# EAGLE board CT_schematic (EAGLE 7.6.0)

Size 100 x 80 mm. Coordinates in mm from the lower left corner, seen from the top.
Outline: 0,0 100,0 100,80 0,80 0,0
Copper layers (1*16): Top 0.035mm / dielectric 1.5mm / Bottom 0.035mm
Design rules "default": minimum track width 10mil, minimum drill 24mil, track to track 8mil, track to pad 8mil, pad to pad 8mil, via to via 8mil, smd to smd 8mil, copper to edge 40mil, drill to drill 8mil, minimum pad ring 10mil, minimum via ring 8mil, stop-mask expansion 4mil, vias tented up to drill 0mil, thermal gap 10mil

## Footprints (pad centres in the part's own frame; a part is rotated, then mirrored left to right if it is on the bottom)
C0603 = smd 0.8 x 0.8: 1 -0.762,0; 2 0.762,0
C0402 = smd 0.5 x 0.5: 1 -0.508,0; 2 0.508,0
C1206 = smd 1.3 x 1.6: 1 -1.524,0; 2 1.524,0
C0805 = smd 1.2 x 1.3: 1 -1.016,0; 2 1.016,0
2220 = smd 1.85 x 5.5: 1 -2.55,0; 2 2.55,0
C1210 = smd 1.2 x 2.5: 1 -1.524,0; 2 1.524,0
EXV-9H = smd 3.505 x 1.676: 1 -2.857,0; 2 2.857,0
L0603 = smd 0.8 x 0.8: 1 -0.762,0; 2 0.762,0
DR1040 = smd 1.6 x 3.2: 1 -4.458,0; 2 4.458,0
PJ-037B_PACKAGE = drill 3.7 square: 1 12,0 | drill 3.2 square: 2 6,0
R0603 = smd 0.8 x 0.8: 1 -0.762,0; 2 0.762,0
TFBGA216 = smd 0.4 x 0.4: A1 -5.6,5.6; A2 -4.8,5.6; A3 -4,5.6; A4 -3.2,5.6; A5 -2.4,5.6; A6 -1.6,5.6; A7 -0.8,5.6; A8 0,5.6; A9 0.8,5.6; A10 1.6,5.6; A11 2.4,5.6; A12 3.2,5.6; A13 4,5.6; A14 4.8,5.6; A15 5.6,5.6; B1 -5.6,4.8; B2 -4.8,4.8; B3 -4,4.8; B4 -3.2,4.8; B5 -2.4,4.8; B6 -1.6,4.8; B7 -0.8,4.8; B8 0,4.8; B9 0.8,4.8; B10 1.6,4.8; B11 2.4,4.8; B12 3.2,4.8; B13 4,4.8; B14 4.8,4.8; B15 5.6,4.8; C1 -5.6,4; C2 -4.8,4; C3 -4,4; C4 -3.2,4; C5 -2.4,4; C6 -1.6,4; C7 -0.8,4; C8 0,4; C9 0.8,4; C10 1.6,4; C11 2.4,4; C12 3.2,4; C13 4,4; C14 4.8,4; C15 5.6,4; D1 -5.6,3.2; D2 -4.8,3.2; D3 -4,3.2; D4 -3.2,3.2; D5 -2.4,3.2; D6 -1.6,3.2; D7 -0.8,3.2; D8 0,3.2; D9 0.8,3.2; D10 1.6,3.2; D11 2.4,3.2; D12 3.2,3.2; D13 4,3.2; D14 4.8,3.2; D15 5.6,3.2; E1 -5.6,2.4; E2 -4.8,2.4; E3 -4,2.4; E4 -3.2,2.4; E5 -2.4,2.4; E6 -1.6,2.4; E7 -0.8,2.4; E8 0,2.4; E9 0.8,2.4; E10 1.6,2.4; E11 2.4,2.4; E12 3.2,2.4; E13 4,2.4; E14 4.8,2.4; E15 5.6,2.4; F1 -5.6,1.6; F2 -4.8,1.6; F3 -4,1.6; F4 -3.2,1.6; F5 -2.4,1.6; F6 -1.6,1.6; F7 -0.8,1.6; F8 0,1.6; F9 0.8,1.6; F10 1.6,1.6; F11 2.4,1.6; F12 3.2,1.6; F13 4,1.6; F14 4.8,1.6; F15 5.6,1.6; G1 -5.6,0.8; G2 -4.8,0.8; G3 -4,0.8; G4 -3.2,0.8; G5 -2.4,0.8; G6 -1.6,0.8; G10 1.6,0.8; G11 2.4,0.8; G12 3.2,0.8; G13 4,0.8; G14 4.8,0.8; G15 5.6,0.8; H1 -5.6,0; H2 -4.8,0; H3 -4,0; H4 -3.2,0; H5 -2.4,0; H6 -1.6,0; H10 1.6,0; H11 2.4,0; H12 3.2,0; H13 4,0; H14 4.8,0; H15 5.6,0; J1 -5.6,-0.8; J2 -4.8,-0.8; J3 -4,-0.8; J4 -3.2,-0.8; J5 -2.4,-0.8; J6 -1.6,-0.8; J10 1.6,-0.8; J11 2.4,-0.8; J12 3.2,-0.8; J13 4,-0.8; J14 4.8,-0.8; J15 5.6,-0.8; K1 -5.6,-1.6; K2 -4.8,-1.6; K3 -4,-1.6; K4 -3.2,-1.6; K5 -2.4,-1.6; K6 -1.6,-1.6; K7 -0.8,-1.6; K8 0,-1.6; K9 0.8,-1.6; K10 1.6,-1.6; K11 2.4,-1.6; K12 3.2,-1.6; K13 4,-1.6; K14 4.8,-1.6; K15 5.6,-1.6; L1 -5.6,-2.4; L2 -4.8,-2.4; L3 -4,-2.4; L4 -3.2,-2.4; L5 -2.4,-2.4; L6 -1.6,-2.4; L7 -0.8,-2.4; L8 0,-2.4; L9 0.8,-2.4; L10 1.6,-2.4; L11 2.4,-2.4; L12 3.2,-2.4; L13 4,-2.4; L14 4.8,-2.4; L15 5.6,-2.4; M1 -5.6,-3.2; M2 -4.8,-3.2; M3 -4,-3.2; M4 -3.2,-3.2; M5 -2.4,-3.2; M6 -1.6,-3.2; M7 -0.8,-3.2; M8 0,-3.2; M9 0.8,-3.2; M10 1.6,-3.2; M11 2.4,-3.2; M12 3.2,-3.2; M13 4,-3.2; M14 4.8,-3.2; M15 5.6,-3.2; N1 -5.6,-4; N2 -4.8,-4; N3 -4,-4; N4 -3.2,-4; N5 -2.4,-4; N6 -1.6,-4; N7 -0.8,-4; N8 0,-4; N9 0.8,-4; N10 1.6,-4; N11 2.4,-4; N12 3.2,-4; N13 4,-4; N14 4.8,-4; N15 5.6,-4; P1 -5.6,-4.8; P2 -4.8,-4.8; P3 -4,-4.8; P4 -3.2,-4.8; P5 -2.4,-4.8; P6 -1.6,-4.8; P7 -0.8,-4.8; P8 0,-4.8; P9 0.8,-4.8; P10 1.6,-4.8; P11 2.4,-4.8; P12 3.2,-4.8; P13 4,-4.8; P14 4.8,-4.8; P15 5.6,-4.8; R1 -5.6,-5.6; R2 -4.8,-5.6; R3 -4,-5.6; R4 -3.2,-5.6; R5 -2.4,-5.6; R6 -1.6,-5.6; R7 -0.8,-5.6; R8 0,-5.6; R9 0.8,-5.6; R10 1.6,-5.6; R11 2.4,-5.6; R12 3.2,-5.6; R13 4,-5.6; R14 4.8,-5.6; R15 5.6,-5.6
ETRX3587 = smd 1 x 1.4: 1 0,0; 2 1.27,0; 3 2.54,0; 4 3.81,0; 5 5.08,0; 6 6.35,0; 7 7.62,0; 8 8.89,0; 9 10.16,0; 10 11.43,0; 11 12.7,0; 12 13.97,0; 13 15.24,0; 14 16.51,0; 15 17.78,0; 16 19.05,0; 17 20.32,0; 18 21.59,0; 19 22.86,0; 20 22.86,18.8; 21 21.59,18.8; 22 20.32,18.8; 23 19.05,18.8; 24 17.78,18.8; 25 16.51,18.8; 26 15.24,18.8; 27 13.97,18.8; 28 12.7,18.8; 29 11.43,18.8; 30 10.16,18.8; 31 8.89,18.8; 32 7.62,18.8; 33 6.35,18.8
WSON-6 = smd 0.4 x 0.6: 1 -1,-1.4; 2 0,-1.4; 3 1,-1.4; 4 1,1.4; 5 0,1.4; 6 -1,1.4 | drill 0.2 pad 0.3: P$1 0.95,0; P$2 -0.95,0; P$3 0,-0.5; P$4 0,0.5 | smd 2.4 x 1.5: PAD 0,0
SOIC-8 = smd 1.6 x 0.6: 1 -2.7,1.905 | smd 1.55 x 0.6: 2 -2.7,0.635; 3 -2.7,-0.635; 4 -2.7,-1.905; 5 2.7,-1.905; 6 2.7,-0.635; 7 2.7,0.635; 8 2.7,1.905
182-009-MALE = drill 1.194 pad 1.524 octagon: 1 -5.537,10.923; 2 -2.769,10.923; 3 0,10.923; 4 2.769,10.923; 5 5.537,10.923; 6 -4.153,8.08; 7 -1.384,8.08; 8 1.384,8.08; 9 4.153,8.08 | hole 3.048: -12.446,9.501; 12.446,9.501
LBGA-64 = smd 0.559 x 0.559: A1 -3.5,3.5; A2 -2.5,3.5; A3 -1.5,3.5; A4 -0.5,3.5; A5 0.5,3.5; A6 1.5,3.5; A7 2.5,3.5; A8 3.5,3.5; B1 -3.5,2.5; B2 -2.5,2.5; B3 -1.5,2.5; B4 -0.5,2.5; B5 0.5,2.5; B6 1.5,2.5; B7 2.5,2.5; B8 3.5,2.5; C1 -3.5,1.5; C2 -2.5,1.5; C3 -1.5,1.5; C4 -0.5,1.5; C5 0.5,1.5; C6 1.5,1.5; C7 2.5,1.5; C8 3.5,1.5; D1 -3.5,0.5; D2 -2.5,0.5; D3 -1.5,0.5; D4 -0.5,0.5; D5 0.5,0.5; D6 1.5,0.5; D7 2.5,0.5; D8 3.5,0.5; E1 -3.5,-0.5; E2 -2.5,-0.5; E3 -1.5,-0.5; E4 -0.5,-0.5; E5 0.5,-0.5; E6 1.5,-0.5; E7 2.5,-0.5; E8 3.5,-0.5; F1 -3.5,-1.5; F2 -2.5,-1.5; F3 -1.5,-1.5; F4 -0.5,-1.5; F5 0.5,-1.5; F6 1.5,-1.5; F7 2.5,-1.5; F8 3.5,-1.5; G1 -3.5,-2.5; G2 -2.5,-2.5; G3 -1.5,-2.5; G4 -0.5,-2.5; G5 0.5,-2.5; G6 1.5,-2.5; G7 2.5,-2.5; G8 3.5,-2.5; H1 -3.5,-3.5; H2 -2.5,-3.5; H3 -1.5,-3.5; H4 -0.5,-3.5; H5 0.5,-3.5; H6 1.5,-3.5; H7 2.5,-3.5; H8 3.5,-3.5
QFN-32 = smd 0.6 x 0.3: 1 -2.3,1.75; 2 -2.3,1.25; 3 -2.3,0.75; 4 -2.3,0.25; 5 -2.3,-0.25; 6 -2.3,-0.75; 7 -2.3,-1.25; 8 -2.3,-1.75; 17 2.3,-1.75; 18 2.3,-1.25; 19 2.3,-0.75; 20 2.3,-0.25; 21 2.3,0.25; 22 2.3,0.75; 23 2.3,1.25; 24 2.3,1.75 | smd 0.3 x 0.6: 9 -1.75,-2.3; 10 -1.25,-2.3; 11 -0.75,-2.3; 12 -0.25,-2.3; 13 0.25,-2.3; 14 0.75,-2.3; 15 1.25,-2.3; 16 1.75,-2.3; 25 1.75,2.3; 26 1.25,2.3; 27 0.75,2.3; 28 0.25,2.3; 29 -0.25,2.3; 30 -0.75,2.3; 31 -1.25,2.3; 32 -1.75,2.3 | smd 3.2 x 3.2: EXP 0,0
SJ-43515TS-SMT-TR = smd 2.2 x 3: 1 0.6,-7.4; 4 3.4,-7.4 | smd 3 x 3: 2 12.8,-7.4; 5 17,-3 | smd 2 x 3: 3 5.3,0; 6 2.5,0 | drill 1.8: P$7 4.5,-3.69; P$8 11.54,-3.69
WM-64PC = drill 0.6 pad 1: 1 -1,0.95; 2 -1,-0.95
ABLS-25.000MHZ-B2F-T = smd 5.6 x 2.8: 1 -3.81,0; 2 5.69,0
ASEK = smd 1.4 x 1: 1 -1.1,-0.8; 2 1.1,-0.8; 3 1.1,0.8; 4 -1.1,0.8
ASFL1 = smd 1.7 x 1.5: 1 -1.27,-1.1; 2 1.27,-1.1; 3 1.27,1.1; 4 -1.27,1.1
WSON-8 = smd 0.3 x 0.6: 1 -0.75,0; 2 0.05,0; 3 0.85,0; 4 1.65,0; 5 1.65,3.8; 6 0.85,3.8; 7 0.05,3.8; 8 -0.75,3.8 | smd 3 x 2.6: PAD 0.45,1.9
QFN-16_EP = smd 0.805 x 0.3: 1 -1.452,0.75; 2 -1.452,0.25; 3 -1.452,-0.25; 4 -1.452,-0.75; 9 1.452,-0.75; 10 1.452,-0.25; 11 1.452,0.25; 12 1.452,0.75 | smd 0.3 x 0.805: 5 -0.75,-1.452; 6 -0.25,-1.452; 7 0.25,-1.452; 8 0.75,-1.452; 13 0.75,1.452; 14 0.25,1.452; 15 -0.25,1.452; 16 -0.75,1.452 | smd 1.55 x 1.55: 17 0,0
SON-6 = smd 0.55 x 0.3: 1 -0.355,0.5 | smd 0.52 x 0.3: 2 -0.37,0; 3 -0.37,-0.5; 4 0.37,-0.5; 5 0.37,0; 6 0.37,0.5
SW_4-1437565-2 = smd 1.4 x 2.1: 1 -2.23,4.55; 2 -2.23,-4.55; 3 2.23,4.55; 4 2.23,-4.55
LGM67K-G1J2-24-Z = smd 0.8 x 1.4: A -2,0; C 0,0
NC7SZ125M5X = smd 1.3 x 0.7: 1 -1.3,0.95; 2 -1.3,0; 3 -1.3,-0.95; 4 1.3,-0.95; 5 1.3,0.95

## Placement (x,y rotation side)
C1  1e-06  [C0603]  -35.56,91.44 0 top  (outside the outline)
C2  1e-07  [C0603]  -39.37,91.44 0 top  (outside the outline)
C3  1e-07  [C0603]  -43.18,91.44 0 top  (outside the outline)
C4  1e-07  [C0603]  -46.99,91.44 0 top  (outside the outline)
C5  1e-07  [C0603]  -50.8,91.44 0 top  (outside the outline)
C6  1e-07  [C0603]  -54.61,91.44 0 top  (outside the outline)
C7  1e-07  [C0603]  -58.42,91.44 0 top  (outside the outline)
C8  1e-07  [C0603]  -62.23,91.44 0 top  (outside the outline)
C9  1e-07  [C0603]  -66.04,91.44 0 top  (outside the outline)
C10  1e-07  [C0603]  -69.85,91.44 0 top  (outside the outline)
C11  1e-07  [C0603]  -73.66,91.44 0 top  (outside the outline)
C12  1e-07  [C0603]  -77.47,91.44 0 top  (outside the outline)
C13  1e-07  [C0603]  -81.28,91.44 0 top  (outside the outline)
C14  1e-07  [C0603]  -85.09,91.44 0 top  (outside the outline)
C15  1e-07  [C0603]  -88.9,91.44 0 top  (outside the outline)
C16  1e-07  [C0603]  -92.71,91.44 0 top  (outside the outline)
C17  1e-07  [C0603]  -96.52,91.44 0 top  (outside the outline)
C18  1e-07  [C0603]  -15.24,96.52 0 top  (outside the outline)
C19  1e-07  [C0603]  -19.05,96.52 0 top  (outside the outline)
C20  1e-07  [C0603]  -22.86,96.52 0 top  (outside the outline)
C21  1e-07  [C0603]  -26.67,96.52 0 top  (outside the outline)
C22  4.7e-06  [C0603]  -24.13,91.44 0 top  (outside the outline)
C23  1e-08  [C0603]  -30.48,96.52 0 top  (outside the outline)
C24  1e-06  [C0603]  -34.29,96.52 0 top  (outside the outline)
C25  2.2e-06  [C0603]  -27.94,91.44 0 top  (outside the outline)
C26  2.2e-06  [C0603]  -31.75,91.44 0 top  (outside the outline)
C27  1e-11  [C0402]  -57.15,101.6 0 top  (outside the outline)
C28  1e-11  [C0402]  -60.96,101.6 0 top  (outside the outline)
C29  1e-07  [C0402]  -64.77,101.6 0 top  (outside the outline)
C30  1e-08  [C0402]  -68.58,101.6 0 top  (outside the outline)
C31  1e-06  [C0603]  -38.1,96.52 0 top  (outside the outline)
C32  1e-06  [C0603]  -41.91,96.52 0 top  (outside the outline)
C33  1e-08  [C0402]  -72.39,101.6 0 top  (outside the outline)
C34  1e-08  [C0402]  -76.2,101.6 0 top  (outside the outline)
C35  1e-06  [C0603]  -45.72,96.52 0 top  (outside the outline)
C36  1e-06  [C0603]  -49.53,96.52 0 top  (outside the outline)
C37  1e-06  [C0603]  -53.34,96.52 0 top  (outside the outline)
C38  1e-06  [C0603]  -57.15,96.52 0 top  (outside the outline)
C39  1e-06  [C0603]  -60.96,96.52 0 top  (outside the outline)
C40  1e-06  [C0603]  -64.77,96.52 0 top  (outside the outline)
C41  1e-06  [C0603]  -68.58,96.52 0 top  (outside the outline)
C42  1e-07  [C0402]  -80.01,101.6 0 top  (outside the outline)
C43  1e-07  [C0402]  -83.82,101.6 0 top  (outside the outline)
C44  1e-07  [C0402]  -87.63,101.6 0 top  (outside the outline)
C45  1e-07  [C0402]  -91.44,101.6 0 top  (outside the outline)
C46  1e-06  [C0603]  -72.39,96.52 0 top  (outside the outline)
C47  1e-08  [C0402]  -95.25,101.6 0 top  (outside the outline)
C48  1e-08  [C0402]  -99.06,101.6 0 top  (outside the outline)
C49  1e-08  [C0402]  -15.24,106.68 0 top  (outside the outline)
C50  1e-05  [C1206]  -55.88,78.74 0 top  (outside the outline)
C51  1e-05  [C0805]  -80.01,78.74 0 top  (outside the outline)
C52  1e-05  [C0805]  -85.09,78.74 0 top  (outside the outline)
C53  1e-06  [C0603]  -76.2,96.52 0 top  (outside the outline)
C54  1e-07  [C0402]  -19.05,106.68 0 top  (outside the outline)
C55  6.8e-05  [2220]  -45.72,59.69 0 top  (outside the outline)
C56  1e-06  [C0603]  -80.01,96.52 0 top  (outside the outline)
C57  1e-05  [C1210]  -49.53,78.74 0 top  (outside the outline)
C58  1e-07  [C0402]  -22.86,106.68 0 top  (outside the outline)
C59  0.0001  [EXV-9H]  -63.5,69.85 0 top  (outside the outline)
C60  0.0001  [EXV-9H]  -74.93,69.85 0 top  (outside the outline)
C61  1e-08  [C0402]  -26.67,106.68 0 top  (outside the outline)
C62  1e-08  [C0402]  -30.48,106.68 0 top  (outside the outline)
C63  1e-08  [C0402]  -34.29,106.68 0 top  (outside the outline)
F1  240.0  [L0603]  -83.82,96.52 0 top  (outside the outline)
I1  3.8e-06  [DR1040]  -82.55,45.72 0 top  (outside the outline)
J1  PJ-037B  [PJ-037B_PACKAGE]  -55.88,48.26 0 top  (outside the outline)
R2  1000.0  [R0603]  -87.63,96.52 0 top  (outside the outline)
R7  4700.0  [R0603]  -91.44,96.52 0 top  (outside the outline)
R8  4700.0  [R0603]  -95.25,96.52 0 top  (outside the outline)
R9  4700.0  [R0603]  -15.24,101.6 0 top  (outside the outline)
R10  2200.0  [R0603]  -19.05,101.6 0 top  (outside the outline)
R12  2200.0  [R0603]  -22.86,101.6 0 top  (outside the outline)
R14  10000.0  [R0603]  -40.64,86.36 0 top  (outside the outline)
R15  10000.0  [R0603]  -45.72,86.36 0 top  (outside the outline)
R16  10000.0  [R0603]  -50.8,86.36 0 top  (outside the outline)
R17  10000.0  [R0603]  -55.88,86.36 0 top  (outside the outline)
R18  10000.0  [R0603]  -60.96,86.36 0 top  (outside the outline)
R19  120.0  [R0603]  -26.67,101.6 0 top  (outside the outline)
R20  10000.0  [R0603]  -66.04,86.36 0 top  (outside the outline)
R21  10000.0  [R0603]  -71.12,86.36 0 top  (outside the outline)
R22  10000.0  [R0603]  -76.2,86.36 0 top  (outside the outline)
R23  10000.0  [R0603]  -81.28,86.36 0 top  (outside the outline)
R24  10000.0  [R0603]  -86.36,86.36 0 top  (outside the outline)
R25  1270.0  [R0603]  -30.48,101.6 0 top  (outside the outline)
R26  1270.0  [R0603]  -34.29,101.6 0 top  (outside the outline)
R27  100000.0  [R0603]  -90.17,77.47 0 top  (outside the outline)
R28  200.0  [R0603]  -38.1,101.6 0 top  (outside the outline)
R29  1000.0  [R0603]  -41.91,101.6 0 top  (outside the outline)
R30  20000.0  [R0603]  -91.44,86.36 0 top  (outside the outline)
R31  91000.0  [R0603]  -96.52,86.36 0 top  (outside the outline)
R32  300000.0  [R0603]  -95.25,77.47 0 top  (outside the outline)
R33  100000.0  [R0603]  -15.24,86.36 0 top  (outside the outline)
R34  300000.0  [R0603]  -20.32,86.36 0 top  (outside the outline)
R35  100000.0  [R0603]  -25.4,86.36 0 top  (outside the outline)
R36  10000.0  [R0603]  -15.24,91.44 0 top  (outside the outline)
R37  10000.0  [R0603]  -20.32,91.44 0 top  (outside the outline)
R38  9100.0  [R0603]  -45.72,101.6 0 top  (outside the outline)
R39  680000.0  [R0603]  -30.48,86.36 0 top  (outside the outline)
R40  120000.0  [R0603]  -35.56,86.36 0 top  (outside the outline)
U1  STM32F429NEH6  [TFBGA216]  -24.13,31.75 0 top  (outside the outline)
U2  ETRX3587  [ETRX3587]  -48.26,1.27 0 top  (outside the outline)
U3  HDC1080DMBR  [WSON-6]  -34.29,69.85 0 top  (outside the outline)
U4  MCP2562-E/SN  [SOIC-8]  -36.83,59.69 0 top  (outside the outline)
U5  182-009-113R531  [182-009-MALE]  -73.66,6.35 0 top  (outside the outline)
U6  mt28ew512aba1HPC-0AAT  [LBGA-64]  -36.83,30.48 0 top  (outside the outline)
U7  SGTL5000XNAA3  [QFN-32]  -22.86,60.96 0 top  (outside the outline)
U8  SJ-43515TS-SMT-TR  [SJ-43515TS-SMT-TR]  -71.12,31.75 0 top  (outside the outline)
U9  SJ-43515TS-SMT-TR  [SJ-43515TS-SMT-TR]  -99.06,31.75 0 top  (outside the outline)
U10  SJ-43515TS-SMT-TR  [SJ-43515TS-SMT-TR]  -39.37,49.53 0 top  (outside the outline)
U11  WM-64PCT  [WM-64PC]  -95.25,45.72 0 top  (outside the outline)
U12  ABLS-25.000MHZ-B2F-T  [ABLS-25.000MHZ-B2F-T]  -26.67,80.01 0 top  (outside the outline)
U13  ASEK-32.768KHz-ECST  [ASEK]  -54.61,69.85 0 top  (outside the outline)
U14  ASFL-24.57MHZ-NCS  [ASFL1]  -27.94,71.12 0 top  (outside the outline)
U15  LP3878SDX-ADJ/NOPB  [WSON-8]  -67.31,58.42 0 top  (outside the outline)
U16  LTC3601EUD#PBF  [QFN-16_EP]  -50.8,101.6 0 top  (outside the outline)
U17  LP2951ACSDX/NOPB  [WSON-8]  -85.09,58.42 0 top  (outside the outline)
U18  TPS3895ADRYR  [SON-6]  -36.83,105.41 0 top  (outside the outline)
U19  4-1437565-2  [SW_4-1437565-2]  -72.39,46.99 0 top  (outside the outline)
U20  Q65110A2395  [LGM67K-G1J2-24-Z]  -38.1,78.74 0 top  (outside the outline)
U21  nc7sz125m5x  [NC7SZ125M5X]  -60.96,77.47 0 top  (outside the outline)
U22  nc7sz125m5x  [NC7SZ125M5X]  -67.31,77.47 0 top  (outside the outline)
U23  nc7sz125m5x  [NC7SZ125M5X]  -73.66,77.47 0 top  (outside the outline)

## Library data of the parts
C1-C63 F1 I1 J1 R2 R7-R10 R12 R14-R40 U1-U23 = circuit_tree

## Nets
CLK_CRYSTAL_U1_G1: C27.1 U1.G1 U12.1
CLK_CRYSTAL_U1_H1: C28.1 U1.H1 U12.2
CLK_U1_E1: U1.E1 U13.3
CLK_U7_21: U7.21 U14.3
GND: C1.2 C2.2 C3.2 C4.2 C5.2 C6.2 C7.2 C8.2 C9.2 C10.2 C11.2 C12.2 C13.2 C14.2 C15.2 C16.2 C17.2 C18.2 C19.2 C20.2 C21.2 C22.2 C23.2 C24.2 C25.2 C26.2 C27.2 C28.2 C29.2 C30.2 C31.2 C32.2 C33.2 C34.2 C42.2 C43.2 C44.2 C45.2 C46.2 C47.2 C48.2 C49.2 C50.2 C51.2 C52.2 C53.2 C55.1 C55.2 C56.2 C57.2 C58.2 C59.2 C60.2 C61.2 C62.2 C63.2 J1.2 R2.2 R16.2 R17.2 R18.2 R26.2 R29.2 R30.2 R32.2 R35.2 R38.2 R40.2 U1.F2 U1.F6 U1.F7 U1.F8 U1.F9 U1.F10 U1.G6 U1.G10 U1.H6 U1.H10 U1.J6 U1.J10 U1.K6 U1.K7 U1.K8 U1.K9 U1.K10 U1.L6 U1.M1 U1.N1 U2.1 U2.13 U2.19 U2.20 U2.31 U2.33 U3.2 U3.PAD U4.2 U4.8 U5.5 U6.E8 U6.H2 U6.H7 U7.1 U7.3 U7.7 U7.EXP U9.1 U10.1 U11.2 U13.2 U14.2 U15.3 U15.PAD U16.1 U16.9 U16.17 U17.3 U17.4 U17.PAD U18.2 U20.C U21.1 U21.3 U22.1 U22.3 U23.1 U23.3
NET_U1_A7: R10.1 U1.A7 U3.6
NET_U1_B4: R12.1 U1.B4 U3.1
NET_U1_E5: R14.1 U1.E5
NET_U1_E6: R15.1 U1.E6
NET_U1_E11: C26.1 U1.E11
NET_U1_J1: R9.1 U1.J1 U23.4
NET_U1_L5: R17.1 U1.L5
NET_U1_L11: C25.1 U1.L11
NET_U1_M5: R16.1 U1.M5
NET_U1_R1: C23.1 C24.1 F1.1 U1.P1 U1.R1
NET_U1_R14: U20.A
NET_U1_R15: U19.3 U19.4
NET_U2_7: R8.1 U2.7 U22.4
NET_U2_21: R18.1 U2.21
NET_U4_6: R19.2 U4.6
NET_U5_2: R19.2 U4.6 U5.2
NET_U5_3: R19.1 U4.7 U5.3
NET_U6_B4: R23.1 U6.B4
NET_U6_B5: R7.1 U6.B5 U21.4
NET_U7_10: C45.1 U7.10
NET_U7_29: R25.1 U7.29
NET_U7_31: R26.1 U7.31
NET_U8_1: U7.4 U8.1
NET_U8_2: U7.2 U8.2
NET_U8_5: U7.6 U8.5
NET_U9_2: C36.1 U9.2
NET_U9_5: C35.1 U9.5
NET_U9_11: C36.2
NET_U9_12: C35.2
NET_U10_2: C38.1 C39.1 U10.2
NET_U10_5: C37.1 U10.5
NET_U10_13: C38.2 C39.2
NET_U10_14: C37.2
NET_U11_1: C40.1 C41.1 C46.1 U7.16 U11.1
NET_U11_15: C40.2 C41.2
NET_U15_1: C49.1 U15.1
NET_U15_6: R28.2 R29.1 U15.6
NET_U15_8: R27.1 U15.8
NET_U16_3: C54.2 I1.1 U16.3 U16.4
NET_U16_6: C54.1 U16.6
NET_U16_7: C53.1 U16.7 U16.12
NET_U16_10: R32.1 U16.10
NET_U16_11: R30.1 R31.1 U16.11
NET_U16_14: U16.14
NET_U16_ATNET_3: I1.2 R31.2
NET_U17_5: R33.1 U17.5
NET_U17_7: R34.2 R35.1 U17.7
NET_U18_1: R37.1 R38.1 U18.1
NET_U18_3: R39.2 R40.1 U18.3
NET_U18_4: R36.1 U18.4 U21.2 U22.2 U23.2
NET_U19_1: R2.1 U19.1 U19.2
PROC_CAN1_RX: U1.C15 U4.4
PROC_CAN1_TX: U1.B15 U4.1
PROC_FMC_A0: U1.D2 U6.E2
PROC_FMC_A1: U1.E2 U6.D2
PROC_FMC_A2: U1.G2 U6.C2
PROC_FMC_A3: U1.H2 U6.A2
PROC_FMC_A4: U1.J2 U6.B2
PROC_FMC_A5: U1.K3 U6.D3
PROC_FMC_A6: U1.M6 U6.C3
PROC_FMC_A7: U1.N6 U6.A3
PROC_FMC_A8: U1.P6 U6.B6
PROC_FMC_A9: U1.M8 U6.A6
PROC_FMC_A10: U1.N7 U6.C6
PROC_FMC_A11: U1.M7 U6.D6
PROC_FMC_A12: U1.M13 U6.B7
PROC_FMC_A13: U1.M12 U6.A7
PROC_FMC_A14: U1.N12 U6.C7
PROC_FMC_A15: U1.N11 U6.D7
PROC_FMC_A16: U1.N10 U6.E7
PROC_FMC_A17: U1.M10 U6.B3
PROC_FMC_A18: U1.M11 U6.C4
PROC_FMC_A19: U1.A2 U6.D5
PROC_FMC_A20: U1.A1 U6.D4
PROC_FMC_A21: U1.B1 U6.C5
PROC_FMC_A22: U1.B2 U6.B8
PROC_FMC_A23: U1.A3 U6.C8
PROC_FMC_A24: U1.B3 U6.F8
PROC_FMC_D0: U1.L12 U6.E3
PROC_FMC_D1: U1.K13 U6.H3
PROC_FMC_D2: U1.B12 U6.E4
PROC_FMC_D3: U1.C12 U6.H4
PROC_FMC_D4: U1.R8 U6.H5
PROC_FMC_D5: U1.N9 U6.E5
PROC_FMC_D6: U1.P9 U6.H6
PROC_FMC_D7: U1.R9 U6.E6
PROC_FMC_D8: U1.P10 U6.F3
PROC_FMC_D9: U1.R10 U6.G3
PROC_FMC_D10: U1.R12 U6.F4
PROC_FMC_D11: U1.P11 U6.G4
PROC_FMC_D12: U1.R11 U6.F5
PROC_FMC_D13: U1.L15 U6.G6
PROC_FMC_D14: U1.L14 U6.F6
PROC_FMC_D15: U1.K15 U6.G7
PROC_FMC_NBL0: R24.1 U1.A6 U6.F7
PROC_FMC_NE2: R20.1 U1.D9 U6.F2
PROC_FMC_NOE: R21.1 U1.D11 U6.G2
PROC_FMC_NWAIT: U1.B11 U6.A4
PROC_FMC_NWE: R22.1 U1.C10 U6.A5
PROC_I2S2_CK: U1.C11 U7.24
PROC_I2S2_EXT_SD: U1.C14 U7.25
PROC_I2S2_SD: U1.C13 U7.26
PROC_I2S2_WS: U1.E14 U7.23
PROC_UART4_RX: U1.B13 U2.17
PROC_UART4_TX: U1.B14 U2.18
VCC_S1_9V2: C50.1 C52.1 C56.1 C59.1 C60.1 J1.1 R27.2 U15.4 U16.15 U16.16 U17.8
VCC_TIER1_1V2: C42.1 C51.1 R28.1 U7.30 U15.5
VCC_TIER1_3V3: C1.1 C2.1 C3.1 C4.1 C5.1 C6.1 C7.1 C8.1 C9.1 C10.1 C11.1 C12.1 C13.1 C14.1 C15.1 C16.1 C17.1 C18.1 C19.1 C20.1 C21.1 C22.1 C29.1 C30.1 C32.1 C33.1 C34.1 C43.1 C44.1 C47.1 C48.1 C55.2 C58.1 C61.1 C62.1 C63.1 F1.2 I1.2 R7.2 R8.2 R9.2 R10.2 R12.2 R14.2 R15.2 R20.2 R21.2 R22.2 R23.2 R24.2 R25.2 R31.2 R36.2 R37.2 R39.1 U1.C1 U1.E7 U1.E8 U1.E9 U1.E10 U1.F4 U1.F5 U1.F11 U1.G5 U1.G11 U1.H5 U1.H11 U1.J5 U1.J11 U1.K5 U1.K11 U1.L7 U1.L8 U1.L9 U1.L10 U2.32 U3.5 U4.5 U6.D8 U6.F1 U6.G5 U7.5 U7.20 U13.4 U14.4 U16.8 U18.6 U21.5 U22.5 U23.5
VCC_TIER1_5V0: C31.1 C57.1 R33.2 R34.1 U4.3 U17.1

## Tracks (layer width: path | path; a pad name or v marks a point on that pad's centre or on a via)
CLK_CRYSTAL_U1_G1  (2 unrouted)
CLK_CRYSTAL_U1_H1  (2 unrouted)
CLK_U1_E1  (1 unrouted)
CLK_U7_21  (1 unrouted)
GND  (126 unrouted)
NET_U1_A7  (2 unrouted)
NET_U1_B4  (2 unrouted)
NET_U1_E5  (1 unrouted)
NET_U1_E6  (1 unrouted)
NET_U1_E11  (1 unrouted)
NET_U1_J1  (2 unrouted)
NET_U1_L5  (1 unrouted)
NET_U1_L11  (1 unrouted)
NET_U1_M5  (1 unrouted)
NET_U1_R1  (4 unrouted)
NET_U1_R15  (1 unrouted)
NET_U2_7  (2 unrouted)
NET_U2_21  (1 unrouted)
NET_U4_6  (1 unrouted)
NET_U5_2  (2 unrouted)
NET_U5_3  (2 unrouted)
NET_U6_B4  (1 unrouted)
NET_U6_B5  (2 unrouted)
NET_U7_10  (1 unrouted)
NET_U7_29  (1 unrouted)
NET_U7_31  (1 unrouted)
NET_U8_1  (1 unrouted)
NET_U8_2  (1 unrouted)
NET_U8_5  (1 unrouted)
NET_U9_2  (1 unrouted)
NET_U9_5  (1 unrouted)
NET_U10_2  (2 unrouted)
NET_U10_5  (1 unrouted)
NET_U10_13  (1 unrouted)
NET_U11_1  (4 unrouted)
NET_U11_15  (1 unrouted)
NET_U15_1  (1 unrouted)
NET_U15_6  (2 unrouted)
NET_U15_8  (1 unrouted)
NET_U16_3  (3 unrouted)
NET_U16_6  (1 unrouted)
NET_U16_7  (2 unrouted)
NET_U16_10  (1 unrouted)
NET_U16_11  (2 unrouted)
NET_U16_ATNET_3  (1 unrouted)
NET_U17_5  (1 unrouted)
NET_U17_7  (2 unrouted)
NET_U18_1  (2 unrouted)
NET_U18_3  (2 unrouted)
NET_U18_4  (4 unrouted)
NET_U19_1  (2 unrouted)
PROC_CAN1_RX  (1 unrouted)
PROC_CAN1_TX  (1 unrouted)
PROC_FMC_A0  (1 unrouted)
PROC_FMC_A1  (1 unrouted)
PROC_FMC_A2  (1 unrouted)
PROC_FMC_A3  (1 unrouted)
PROC_FMC_A4  (1 unrouted)
PROC_FMC_A5  (1 unrouted)
PROC_FMC_A6  (1 unrouted)
PROC_FMC_A7  (1 unrouted)
PROC_FMC_A8  (1 unrouted)
PROC_FMC_A9  (1 unrouted)
PROC_FMC_A10  (1 unrouted)
PROC_FMC_A11  (1 unrouted)
PROC_FMC_A12  (1 unrouted)
PROC_FMC_A13  (1 unrouted)
PROC_FMC_A14  (1 unrouted)
PROC_FMC_A15  (1 unrouted)
PROC_FMC_A16  (1 unrouted)
PROC_FMC_A17  (1 unrouted)
PROC_FMC_A18  (1 unrouted)
PROC_FMC_A19  (1 unrouted)
PROC_FMC_A20  (1 unrouted)
PROC_FMC_A21  (1 unrouted)
PROC_FMC_A22  (1 unrouted)
PROC_FMC_A23  (1 unrouted)
PROC_FMC_A24  (1 unrouted)
PROC_FMC_D0  (1 unrouted)
PROC_FMC_D1  (1 unrouted)
PROC_FMC_D2  (1 unrouted)
PROC_FMC_D3  (1 unrouted)
PROC_FMC_D4  (1 unrouted)
PROC_FMC_D5  (1 unrouted)
PROC_FMC_D6  (1 unrouted)
PROC_FMC_D7  (1 unrouted)
PROC_FMC_D8  (1 unrouted)
PROC_FMC_D9  (1 unrouted)
PROC_FMC_D10  (1 unrouted)
PROC_FMC_D11  (1 unrouted)
PROC_FMC_D12  (1 unrouted)
PROC_FMC_D13  (1 unrouted)
PROC_FMC_D14  (1 unrouted)
PROC_FMC_D15  (1 unrouted)
PROC_FMC_NBL0  (2 unrouted)
PROC_FMC_NE2  (2 unrouted)
PROC_FMC_NOE  (2 unrouted)
PROC_FMC_NWAIT  (1 unrouted)
PROC_FMC_NWE  (2 unrouted)
PROC_I2S2_CK  (1 unrouted)
PROC_I2S2_EXT_SD  (1 unrouted)
PROC_I2S2_SD  (1 unrouted)
PROC_I2S2_WS  (1 unrouted)
PROC_UART4_RX  (1 unrouted)
PROC_UART4_TX  (1 unrouted)
VCC_S1_9V2  (10 unrouted)
VCC_TIER1_1V2  (4 unrouted)
VCC_TIER1_3V3  (89 unrouted)
VCC_TIER1_5V0  (5 unrouted)